# Altium PCB PCB.PcbDoc (part 3 of 5)
Units mil, origin at the board's own origin, x right, y up, seen from the top; angles counter-clockwise.
Board outline 7500 x 6500 mil, 2 copper layers (Top Layer, Bottom Layer); 229 components, 273 nets, 1476 pads, 506 vias.
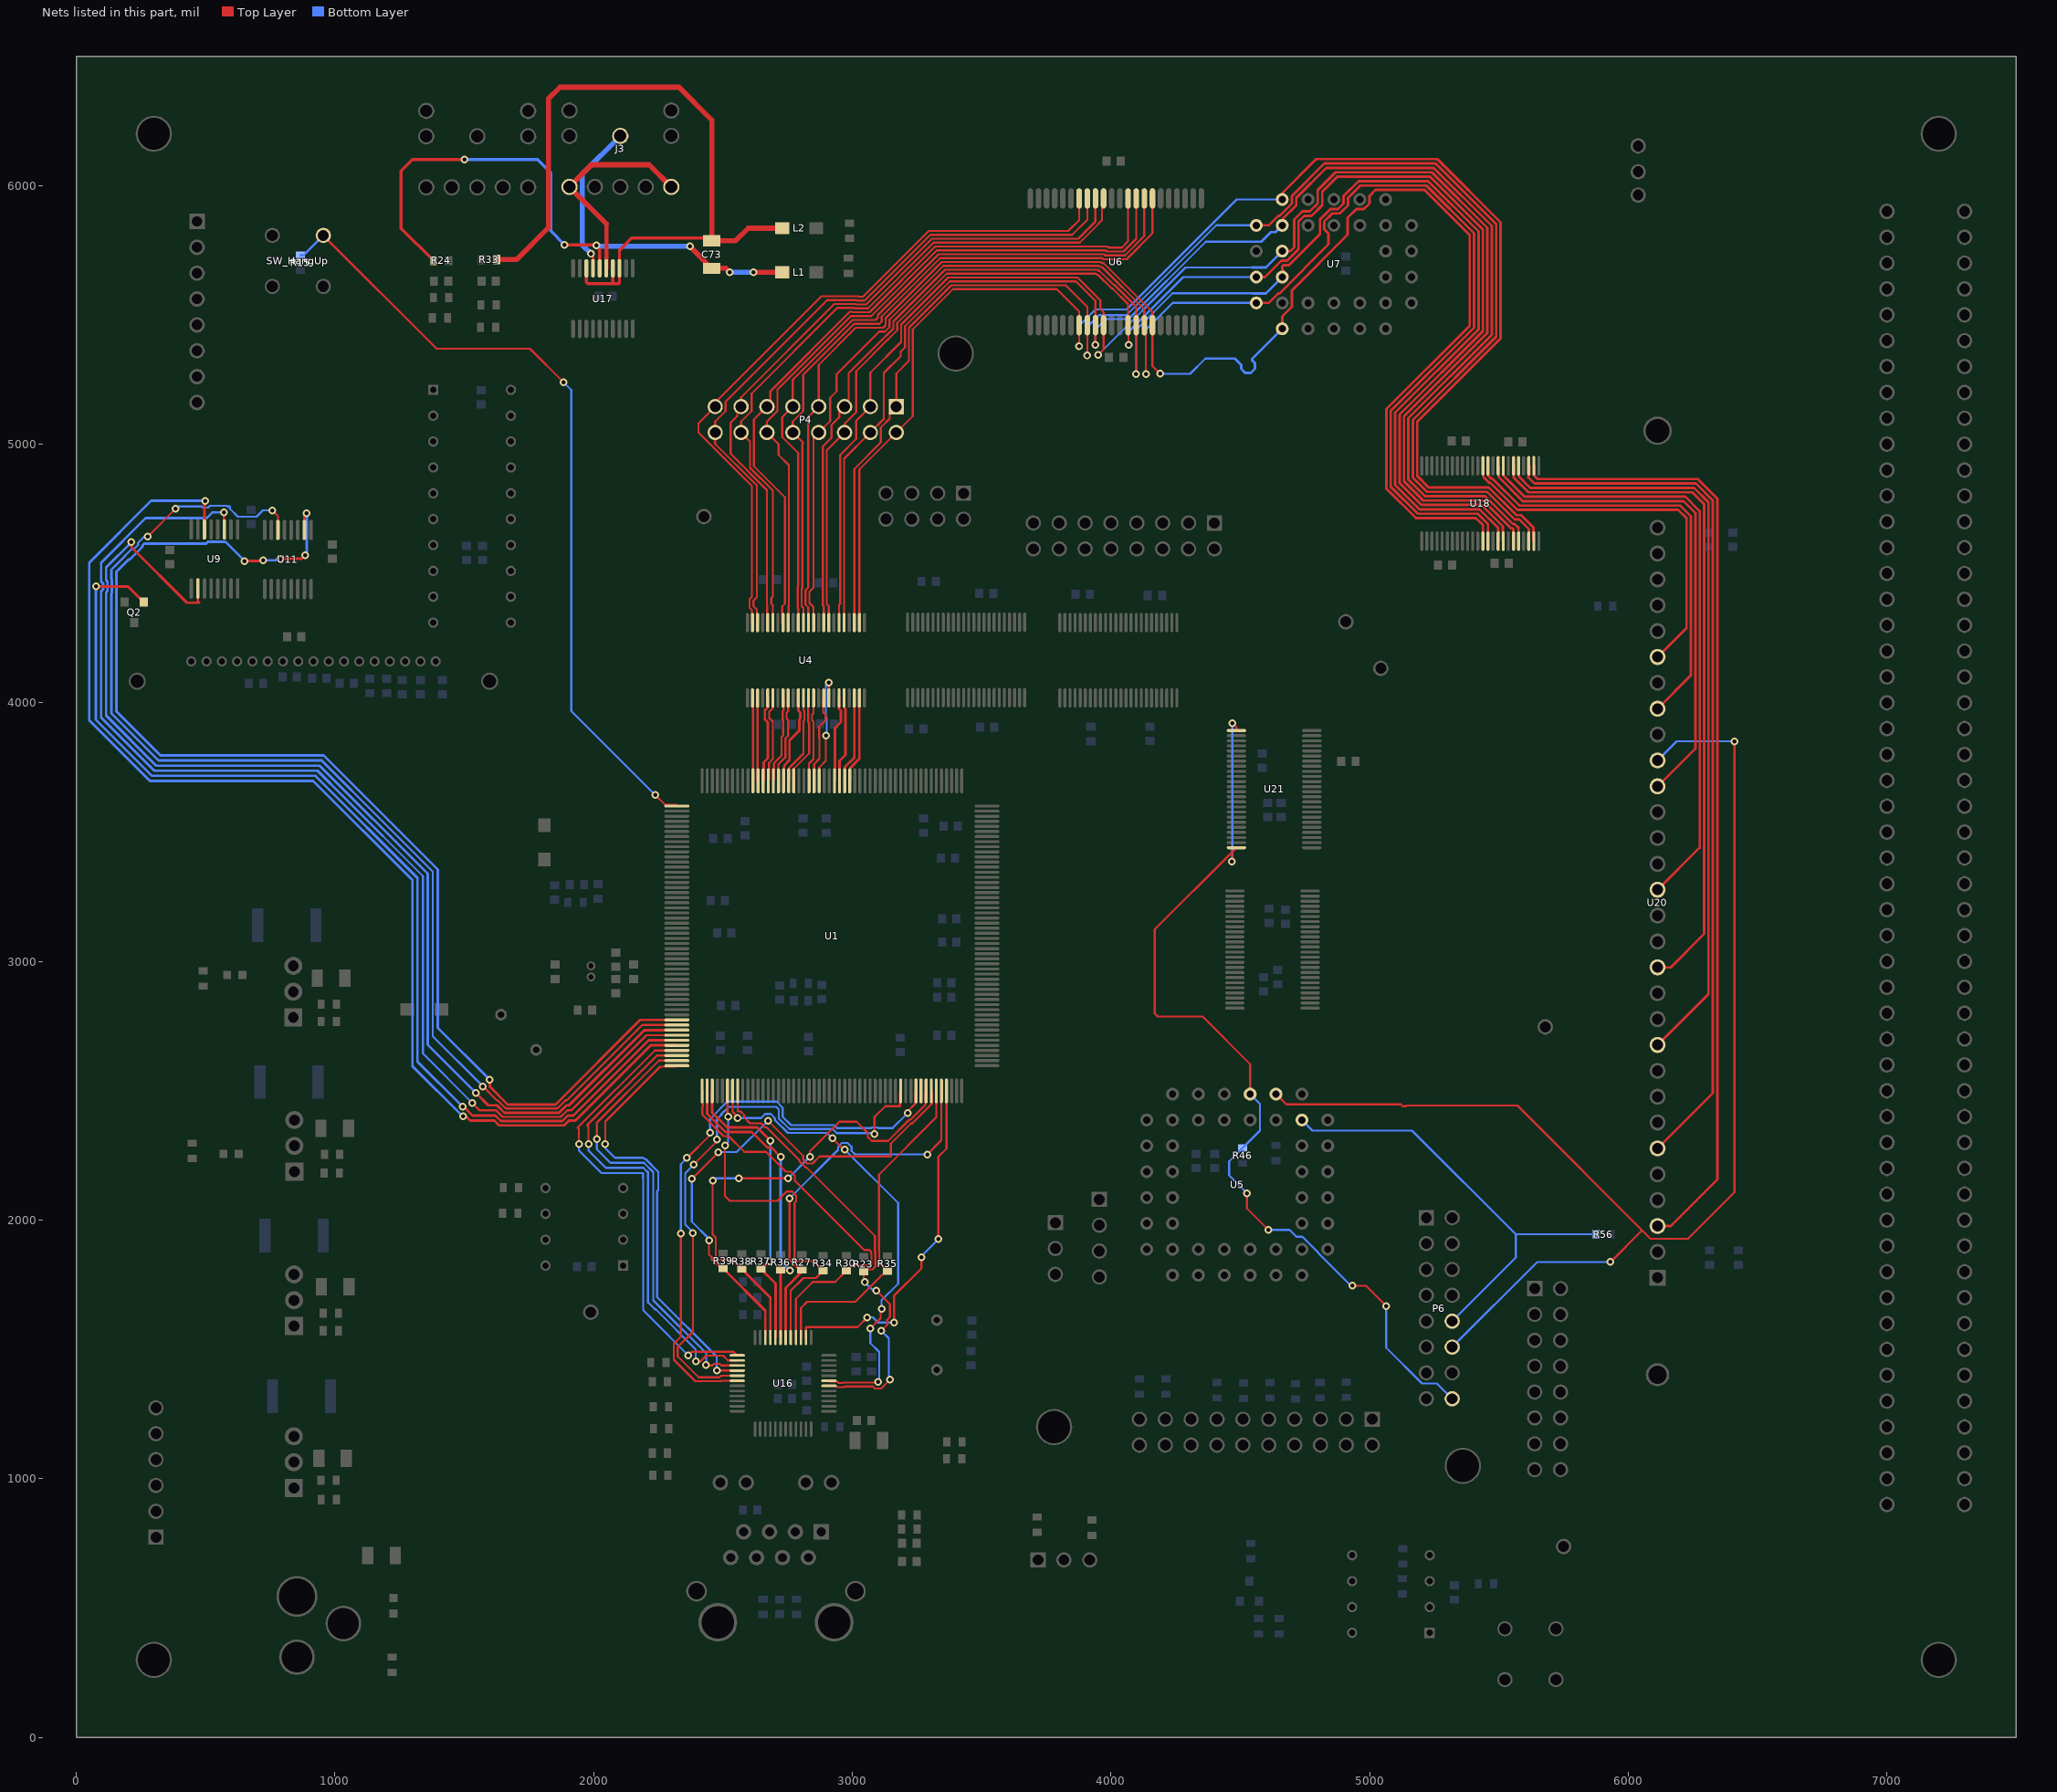
[diagram p3: the nets of this part, all layers, seen from the top]

## Via types
v1: diameter 30, hole 16, Top Layer to Bottom Layer, 500 vias
v2: diameter 30, hole 16, Top Layer to Bottom Layer, tented top, 6 vias

## Nets (pads, with @x,y where several pads share a name; then routed paths per layer and width w, separated by ;. In a path a pad name is that pad's centre, name@x,y a point inside that pad or via, vN(x,y) a via of type N, cw(c..) or ccw(c..) an arc to the next point about the centre after c; other vN are vias at no path point) (continued)
AUD_VDD: C73.2 L1.1 R24.2 U17.6 | length 2305.1
  Top Layer w8: U17.6@2023.18,5680 U17.6@2027,5683.82
  Top Layer w12: R24.2@1380.47,5710 1256,5834.47 1256,6056 1300,6100 v1(1500,6100) ; v1(1888,5771) 2004.25,5771 2009.13,5766.13 2023.18,5752.07 U17.6@2023.18,5680
  Top Layer w20: v1@2009.13,5766.13 v1(2011,5768) ; v1(2371.85,5765) C73.2@2457,5679.85 2511.15,5679.85 v1(2526,5665) ; v1(2618,5665) L1.1@2729.06,5665
  Bottom Layer w12: v1(1500,6100) 1782.93,6100 1834,6048.93 1834,5825 v1(1888,5771)
  Bottom Layer w20: v1(2011,5768) 2008,5765 v1(2371.85,5765) ; v1(2526,5665) v1(2618,5665)
AUD_VSS: C73.1 L2.1 R33.1 U17.3 U17.4 U17.8 | length 2960.2
  Top Layer w12: U17.8@1972,5680 1972,5626 1977,5621 2071,5621 ; U17.4@2074.36,5680 2074.36,5624.36 2071,5621 ; C73.1@2457,5786.15 2457,5797 2147,5797 2099.95,5749.95 U17.3@2099.95,5680 2099.95,5622.95 2098,5621 2071,5621
  Top Layer w20: R33.1@1625.53,5714 1703,5714 1825,5836 1825,6335 1870,6380 2330,6380 2457,6253 C73.1@2457,5797 ; C73.1@2457,5786.15 2548.15,5786.15 2597,5835 L2.1@2729.06,5835
BTN_HANGUP: R15.1 SW_HangUp.1 U1.1 | length 3127.1
  Top Layer w8: SW_HangUp.1@955,5806.85 1392.85,5369 1754,5369 v1(1884,5239) ; v1(2238,3644) 2277.21,3604.79 2317.77,3604.79 U1.1@2321.77,3600.79
  Bottom Layer w8: v1(1884,5239) 1914,5209 1914,3968 v1(2238,3644)
  Bottom Layer w10: R15.1@867,5730.53 878.68,5730.53 SW_HangUp.1@955,5806.85
CAS: P6.10 R56.2 U5.19 | length 1758
  Bottom Layer w8: U5.19@4738,2387 4779,2346 5164,2346 5565,1945 ; P6.10@5319,1609 5565,1855 5565,1945 ; R56.2@5875,1945 5565,1945
COL_ADDR_EN: P6.16 R46.1 U5.22 U21.25 U21.48 | length 3672.1
  Top Layer w8: v1(4468,3387) 4468,3422.73 ; v1(4469,3921) 4485,3905 U21.25@4485,3892.48 ; U21.48@4485,3439.73 4468,3422.73 ; v1(4526,2104) 4526,2045 v1(4609,1962) ; U5.22@4538,2487 4538,2603 4354,2787 4181,2787 4169,2799 4169,3123.73 4468,3422.73 ; v1(4933,1746) 4986,1746 v1(5064,1668)
  Bottom Layer w8: v1(4468,3387) 4469,3388 v1(4469,3921) ; v1(4526,2104) 4457,2173 4457,2226.53 R46.1@4509,2278.53 4576,2345.53 4576,2449 U5.22@4538,2487 ; v1(4609,1962) 4690.88,1962 4716.88,1936 4739.91,1936 4802,1873.91 4802,1872.09 4928.09,1746 v1(4933,1746) ; v1(5064,1668) 5064,1506.69 5202.21,1368.47 5259.53,1368.47 P6.16@5319,1309
D_3V3B0: P4.2 U4.2 U6.7 U7.13 U18.47 | length 5885.8
  Top Layer w8: U4.2@3027.48,4310 3027.48,4902.48 P4.2@3170,5045 3234,5109 3234,5444 3389,5599 3791,5599 3877.02,5512.98 U6.7@3877.02,5460 v1(3877.02,5378.98)
  Top Layer w10: U7.13@4662,5946 4662,5970.45 4793.55,6102 5261.29,6102 5506,5857.29 5506,5408.46 5183.67,5086.13 5183.67,4877.43 5228.16,4832.94 5460.35,4832.94 5567.89,4725.4 5585.52,4725.4 5632.87,4678.05 5632.87,4626.78 U18.47@5634.65,4625
  Bottom Layer w8: v1(3877.02,5378.98) 3877.02,5458.02 3940,5521 4060.95,5521 4485.95,5946 U7.13@4662,5946
D_3V3B1: P4.1 U4.3 U6.8 U7.14 U18.46 | length 5966
  Top Layer w8: U4.3@3007.8,4310 3007.8,4904.01 3110.53,5006.74 3110.53,5064.31 3145,5098.79 3145,5116.6 3144.47,5117.13 3144.47,5119.47 P4.1@3170,5145 3170,5273 3219,5322 3219,5450.21 3382.79,5614 3825,5614 3908.51,5530.49 U6.8@3908.51,5460 v1(3908.51,5342.49)
  Top Layer w10: U7.14@4562,5846 4609.67,5846 4646.67,5883 4651.33,5883 4699,5930.67 4699,5959.37 4824.63,6085 5254.25,6085 5489,5850.25 5489,5415.5 5166.67,5093.17 5166.67,4870.38 5221.12,4815.94 5453.31,4815.94 5560.85,4708.4 5578.48,4708.4 5614.96,4671.92 U18.46@5614.96,4625
  Bottom Layer w8: v1(3908.51,5342.49) 3908.51,5453.51 3954,5499 4060.16,5499 4407.16,5846 U7.14@4562,5846
D_3V3B2: P4.4 U4.5 U6.9 U7.15 U18.44 | length 5894.3
  Top Layer w8: U4.5@2968.43,4310 2968.43,4943.43 P4.4@3070,5045 3122,5097 3122,5275 3187,5340 3187,5357.23 3204,5374.23 3204,5456.43 3376.57,5629 3865,5629 3940.01,5553.99 U6.9@3940.01,5460 v1(3940.01,5383.99)
  Top Layer w10: U7.15@4662,5846 4662,5869.63 4716,5923.63 4716,5952.33 4831.67,6068 5247.21,6068 5472,5843.21 5472,5422.54 5149.67,5100.21 5149.67,4863.34 5214.08,4798.94 5446.27,4798.94 5553.81,4691.4 5560.46,4691.4 5575.59,4676.28 U18.44@5575.59,4625
  Bottom Layer w8: v1(3940.01,5383.99) 3940.01,5443.01 3981,5484 4067.79,5484 4366.79,5783
  Bottom Layer w10: 4366.79,5783 4581.82,5783 4618.82,5820 4636,5820 U7.15@4662,5846
D_3V3B3: P4.3 U4.6 U6.10 U7.17 U18.43 | length 5998.7
  Top Layer w8: U4.6@2948.74,4310 2948.74,4378.97 2953,4383.23 2953,4958 3015,5020 3015,5090 P4.3@3070,5145 3070,5276 3189,5395 3189,5462.64 3370.36,5644 3871.21,5644 3959,5556.21 3959,5522.23 3971.5,5509.73 U6.10@3971.5,5460 3971.5,5366.5 v1(3950,5345)
  Top Layer w10: U7.17@4662,5746 4693.63,5746 4708,5760.37 4708,5868.37 4739.63,5900 4768.33,5900 4799,5930.67 4799,5982.08 4867.92,6051 5240.17,6051 5455,5836.17 5455,5429.58 5132.67,5107.25 5132.67,4856.3 5207.03,4781.94 5439.23,4781.94 5546.76,4674.4 5553.42,4674.4 5555.91,4671.92 U18.43@5555.91,4625
  Bottom Layer w8: v1(3950,5345) 4288,5683 4546.67,5683
  Bottom Layer w10: 4546.67,5683 4599,5683 U7.17@4662,5746
D_3V3B4: P4.6 U4.8 U6.13 U7.18 U18.41 | length 5940.4
  Top Layer w8: U4.8@2909.37,4310 2909.37,4373.86 2901,4382.23 2901,4976 P4.6@2970,5045 2970,5079 3015,5124 3015,5282 3138,5405 3138.85,5405 3174,5440.15 3174,5468.85 3364.15,5659 3941.74,5659 3945.74,5655 3949.8,5655 4003.8,5601 4006.77,5601 4065.99,5541.78 U6.13@4065.99,5460 4068,5457.99 v1(4068,5384)
  Top Layer w10: U7.18@4562,5646 4595.53,5646 4658.53,5709 4680.67,5709 4725,5753.33 4725,5861.33 4746.67,5883 4775.37,5883 4816.57,5924.2 4816.57,5975.61 4874.96,6034 5233.12,6034 5438,5829.12 5438,5436.63 5115.67,5114.3 5115.67,4849.26 5199.99,4764.94 5432.19,4764.94 5514.76,4682.37 5514.76,4626.78 U18.41@5516.54,4625
  Bottom Layer w8: v1(4068,5384) 4068,5434.21 4279.79,5646 U7.18@4562,5646
D_3V3B5: P4.5 U4.9 U6.14 U7.19 U18.40 | length 6167.5
  Top Layer w8: U4.9@2889.69,4310 2889.69,4372.33 2886,4376.02 2886,4991 2920,5025 2920,5073.79 2950,5103.79 2950,5125 P4.5@2970,5145 2986,5161 2986,5274.21 3131.79,5420 3132.64,5420 3159,5446.36 3159,5475.07 3357.93,5674 3947.95,5674 3951.95,5670 3956.02,5670 4010.02,5616 4012.98,5616 4097.49,5531.49 U6.14@4097.49,5460 v1(4097.49,5271.51)
  Top Layer w10: U7.19@4662,5646 4682,5646 4682,5654.28 4662.16,5674.12 4662.16,5688.59 4665.57,5692 4687.72,5692 4808,5812.28 4808,5868.37 4848.63,5909 4877.33,5909 4899,5930.67 4899,5959.37 4956.63,6017 5226.08,6017 5421,5822.08 5421,5443.67 5098.67,5121.34 5098.67,4842.22 5192.95,4747.94 5425.15,4747.94 5496.85,4676.23 U18.40@5496.85,4625
  Bottom Layer w8: v1(4097.49,5271.51) 4097.49,5442.49 4238,5583 4546.67,5583
  Bottom Layer w10: 4546.67,5583 4599,5583 U7.19@4662,5646
D_3V3B6: P4.8 U4.11 U6.15 U7.20 U18.38 | length 6167.2
  Top Layer w8: U4.11@2850.32,4310 2850.32,4369.91 2834,4386.23 2834,4429 2850.32,4445.32 2850.32,5025.32 P4.8@2870,5045 2914,5089 2914,5179 2939,5204 2939,5270 3104,5435 3126.43,5435 3144,5452.57 3144,5481.28 3351.72,5689 3954.16,5689 3958.16,5685 3965.2,5685 4128.98,5521.21 U6.15@4128.98,5460 4135,5453.98 v1(4135,5271)
  Top Layer w10: U7.20@4562,5546 4609.67,5546 4646.67,5583 4651.33,5583 4841.02,5772.69 4841.02,5814.65 4825,5830.67 4825,5861.33 4855.67,5892 4884.37,5892 4916,5923.63 4916,5952.33 4963.67,6000 5219.04,6000 5404,5815.04 5404,5450.71 5081.67,5128.38 5081.67,4835.18 5185.91,4730.94 5418.11,4730.94 5457.48,4691.56 U18.38@5457.48,4625
  Bottom Layer w8: v1(4135,5271) 4135,5442 4239,5546 U7.20@4562,5546
D_3V3B7: P4.7 U4.12 U6.16 U7.21 U18.37 | length 6210.4
  Top Layer w8: U4.12@2830.63,4310 2829.47,4311.16 2829.47,4369.55 2819,4380.02 2819,4435.21 2829.47,4445.69 2829.47,5104.47 P4.7@2870,5145 2870,5306.64 3013.36,5450 3120.21,5450 3129,5458.79 3129,5487.49 3345.51,5704 3960.38,5704 3964.38,5700 3971.45,5700 4160.48,5510.97 U6.16@4160.48,5460 4160.48,5301.52 v1(4190,5272)
  Top Layer w10: U7.21@4662,5446 4662,5493.67 4699,5530.67 4699,5594 4915,5810 4915,5875 4949,5909 4977.33,5909 4999,5930.67 4999,5959 5023,5983 5212,5983 5387,5808 5387,5457.75 5064.67,5135.42 5064.67,4828.13 5178.87,4713.94 5411.06,4713.94 5437.8,4687.21 U18.37@5437.8,4625
  Bottom Layer w8: v1(4190,5272) 4306,5272 4365,5331 4478.37,5331
  Bottom Layer w10: 4478.37,5331 4503,5306.37 4503,5290.82 4518.82,5275 4541.18,5275 4557,5290.82 4557,5313.18 4546,5324.18 4546,5330 U7.21@4662,5446
D_3V3B8: P4.10 U4.13 U6.29 | length 2724.3
  Top Layer w8: U4.13@2810.95,4310 2810.95,4366.86 2804,4373.8 2804,4441.43 2806.26,4443.69 2806.26,4999.37 2810.95,5004.06 P4.10@2770,5045 2770,5087.69 2810.53,5128.21 2810.53,5268.38 3007.15,5465 3105.21,5465 3114,5473.79 3114,5493.71 3339.29,5719 3966.59,5719 3970.59,5715 4060.41,5715 4160.48,5815.07 U6.29@4160.48,5950.08
D_3V3B9: P4.9 U4.14 U6.30 | length 2727.6
  Top Layer w8: U4.14@2791.26,4310 2791.26,4365.33 2789,4367.59 2789,4447.64 2791.26,4449.9 2791.26,4965.9 2729.47,5027.69 2729.47,5104.47 P4.9@2770,5145 2770,5249.06 3000.94,5480 3090.21,5480 3099,5488.79 3099,5499.92 3333.08,5734 3972.8,5734 3976.8,5730 4054.2,5730 4128.98,5804.79 U6.30@4128.98,5950.08
D_3V3B10: P4.12 U4.16 U6.31 | length 2741.7
  Top Layer w8: U4.16@2751.89,4310 2754,4312.11 2754,4376.02 2755,4377.02 2755,4918.79 2715,4958.79 2715,5000 P4.12@2670,5045 2670,5087.69 2710.53,5128.21 2710.53,5210.81 2994.72,5495 3072.87,5495 3326.87,5749 3979.02,5749 3983.02,5745 4047.98,5745 4097.49,5794.51 U6.31@4097.49,5950.08
D_3V3B11: P4.11 U4.17 U6.32 | length 2778.7
  Top Layer w8: U4.17@2732.21,4310 2729.43,4307.22 2729.43,4372.66 2740,4383.23 2740,4794.85 2620,4914.85 2620,5095 P4.11@2670,5145 2688.05,5163.05 2683.66,5167.44 2683.66,5205.15 2990.16,5511.66 2999.28,5511.66 3000.93,5510 3066.65,5510 3320.65,5764 3985.23,5764 3989.23,5760 4041.77,5760 4065.99,5784.22 U6.32@4065.99,5950.08
D_3V3B12: P4.14 U4.19 U6.35 | length 2679.5
  Top Layer w8: U4.19@2692.84,4310 2692.84,4377.4 2687,4383.23 2687,4404.77 2692.84,4410.6 2692.84,4820.8 2605,4908.64 2605,5010 P4.14@2570,5045 2570,5087.69 2610.53,5128.21 2610.53,5195.53 2941.66,5526.66 3005.49,5526.66 3007.15,5525 3060.44,5525 3314.44,5779 3879.9,5779 3954,5853.1 3954,5854.77 3965,5865.77 3965,5943.57 U6.35@3971.5,5950.08
D_3V3B13: P4.13 U4.20 U6.36 | length 2695
  Top Layer w8: P4.13@2586.16,5164.94 P4.13@2588.05,5163.05 ; U4.20@2673.15,4310 2670.37,4312.78 2670.37,4378.64 2670.34,4409.33 2670.37,4822.06 2529.47,4962.95 2529.47,5083.26 2555,5108.79 2555,5123.9 2551.95,5126.95 P4.13@2570,5145 2570,5181 2930.66,5541.66 3011.7,5541.66 3013.36,5540 3054.23,5540 3308.23,5794 3873.69,5794 3939,5859.31 3939,5860.98 3940.01,5861.99 U6.36@3940.01,5950.08
D_3V3B14: P4.16 U4.22 U6.37 | length 2729.9
  Top Layer w8: U4.22@2633.78,4310 2636.56,4312.78 2636.56,4343.4 2632.99,4343.4 2631.98,4342.39 2631,4342.39 2631,4360.23 2618,4373.23 2618,4394.77 2631,4407.77 2631,4840.21 2470,5001.21 P4.16@2470,5045 2470,5087.69 2510.53,5128.21 2510.53,5164.31 2902.87,5556.66 3017.92,5556.66 3019.57,5555 3048.02,5555 3302.02,5809 3850,5809 3908.51,5867.51 U6.37@3908.51,5950.08
D_3V3B15: P4.15 U4.23 U6.38 | length 2755.9
  Top Layer w8: U4.23@2614.1,4310 2611.32,4312.78 2611.32,4358.7 2603,4367.02 2603,4400.98 2611.32,4409.3 2611.32,4838.68 2405,5045 2405,5080 P4.15@2470,5145 2470,5161 2880.66,5571.66 3024.13,5571.66 3025.79,5570 3041.8,5570 3295.8,5824 3835,5824 3877.02,5866.02 U6.38@3877.02,5950.08
D_5V0: U18.2 U20.3 | length 3723.3
  Top Layer w10: U18.2@5636.42,4916.34 U18.2@5634.65,4916.34 5636.42,4914.56 5636.42,4877.43 5648.85,4865 6268.29,4865 6344,4789.29 6344,2157.09 6163.91,1977 U20.3@6113,1977
D_5V1: U18.3 U20.6 | length 3392.1
  Top Layer w10: U18.3@5614.96,4916.34 5616.74,4914.56 5616.74,4880.78 5613,4877.04 5613,4871.38 5636.38,4848 6261.25,4848 6327,4782.25 6327,2491 U20.6@6113,2277
D_5V2: U18.5 U20.10 | length 2996.1
  Top Layer w10: U18.5@5575.59,4916.34 5575.59,4876.33 5620.92,4831 6254.21,4831 6310,4775.21 6310,2874 U20.10@6113,2677
D_5V3: U18.6 U20.13 | length 2720
  Top Layer w10: U18.6@5555.91,4916.34 5557.68,4914.56 5557.68,4870.19 5613.88,4814 6247.17,4814 6293,4768.17 6293,3106.09 6163.91,2977 U20.13@6113,2977
D_5V4: U18.8 U20.16 | length 2385.4
  Top Layer w10: U18.8@5516.54,4916.34 5516.54,4879.2 5598.74,4797 6220.12,4797 6276,4741.12 6276,3440 U20.16@6113,3277
D_5V5: U18.9 U20.20 | length 1979.5
  Top Layer w10: U18.9@5496.85,4916.34 5498.63,4914.56 5498.63,4873.07 5591.7,4780 6213.08,4780 6259,4734.08 6259,3823 U20.20@6113,3677
D_5V6: U18.11 U20.23 | length 1684.6
  Top Layer w10: U18.11@5457.48,4916.34 5457.48,4879.2 5469.75,4866.94 5474.44,4866.94 5578.37,4763 6200.04,4763 6242,4721.04 6242,4106 U20.23@6113,3977
D_5V7: U18.12 U20.25 | length 1478.7
  Top Layer w10: U18.12@5437.8,4916.34 5439.57,4914.56 5439.57,4873.07 5462.71,4849.94 5467.4,4849.94 5571.33,4746 6193,4746 6225,4714 6225,4289 U20.25@6113,4177
DATA0: U1.179 U4.47 | length 335.9
  Top Layer w10: U1.179@2990.08,3698.23 2991.86,3700.01 2991.86,3747.97 3027.48,3783.59 U4.47@3027.48,4018.66
DATA1: U1.180 U4.46 | length 337.7
  Top Layer w10: U1.180@2970.39,3698.23 2972.17,3700.01 2972.17,3752.32 3007.8,3787.95 U4.46@3007.8,4018.66 U4.46@3009.57,4018.66
DATA2: U1.181 U4.44 | length 331.6
  Top Layer w10: U1.181@2950.71,3698.23 2950.71,3775.71 2973.06,3798.06 2973.06,3976.17 2968.43,3980.8 U4.44@2968.43,4018.66
DATA3: U1.182 U4.43 | length 333.8
  Top Layer w10: U1.182@2931.02,3698.23 2932.8,3700.01 2932.8,3901.8 2956.06,3925.06 2956.06,3969.13 2948.74,3976.44 U4.43@2948.74,4018.66
DATA4: U1.185 U4.41 | length 458
  Top Layer w8: U1.185@2871.97,3698.23 2871.97,3749.97 2898,3776 v1(2898,3874) ; U4.41@2909.37,4018.66 v1(2909.37,4078.37)
  Bottom Layer w8: v1(2898,3874) 2901.19,3877.19 2901.19,3941.27 2898,3944.46 2898,4067 v1(2909.37,4078.37)
DATA5: U1.186 U4.40 | length 345.7
  Top Layer w8: U1.186@2852.28,3698.23 2852.28,3763.07 2873,3783.79 2873,3862.23 2872,3863.23 2872,3908.23 2880.77,3917 2881.77,3917 2897,3932.23 2897,3953.77 2886.91,3963.86 2886.91,4015.88 U4.40@2889.69,4018.66
DATA6: U1.187 U4.38 | length 332.2
  Top Layer w8: U1.187@2832.6,3698.23 2832.6,3764.6 2850.32,3782.32 2850.32,3925.91 2845,3931.23 2845,3954.77 2850.32,3960.09 U4.38@2850.32,4018.66
DATA7: U1.190 U4.37 | length 347.4
  Top Layer w8: U1.190@2773.54,3698.23 2773.54,3744.77 2833,3804.23 2833,3922.02 2830,3925.02 2830,3975.02 2829,3976.02 2829,4017.03 U4.37@2830.63,4018.66
DATA8: U1.191 U4.36 | length 347.4
  Top Layer w8: U1.191@2753.86,3698.23 2756.64,3701.01 2756.64,3749.08 2810.95,3803.39 2810.95,3929.13 2815,3933.19 2815,3968.81 2810.95,3972.87 U4.36@2810.95,4018.66
DATA9: U1.192 U4.35 | length 350.5
  Top Layer w10: U1.192@2734.17,3698.23 2735.95,3700.01 2735.95,3752.32 2739.25,3755.62 2739.25,3759.98 2757.54,3778.27 2757.54,3855.17 2794.95,3892.57 2794.95,3935.76 2799,3939.82 2799,3962.18 2791.26,3969.92 U4.35@2791.26,4018.66
DATA10: U1.193 U4.33 | length 340.8
  Top Layer w8: U1.193@2714.49,3698.23 2714.49,3761.97 2741.54,3789.03 2741.54,3861.8 2751.89,3872.14 2751.89,3933.49 2746,3939.38 2746,3961.77 2751.89,3967.66 U4.33@2751.89,4018.66
DATA11: U1.194 U4.32 | length 338.4
  Top Layer w8: U1.194@2694.8,3698.23 2697.58,3701.01 2697.58,3766.28 2726.54,3795.24 2726.54,3868.01 2732.21,3873.67 2732.21,3931.96 2731,3933.17 2731,3967.98 2734,3970.98 2734,4016.87 U4.32@2732.21,4018.66
DATA12: U1.195 U4.30 | length 339.5
  Top Layer w8: U1.195@2675.12,3698.23 2677.9,3701.01 2677.9,3767.81 2693,3782.91 2693,3927.23 2679,3941.23 2679,3964.75 2693,3978.75 2693,4018.5 U4.30@2692.84,4018.66
DATA13: U1.196 U4.29 | length 336.8
  Top Layer w10: U1.196@2655.43,3698.23 2657.21,3700.01 2657.21,3769.75 2673.15,3785.69 2673.15,3924.45 2662.24,3935.36 2662.24,3970.62 2673.15,3981.53 U4.29@2673.15,4018.66
DATA14: U1.197 U4.27 | length 321.2
  Top Layer w10: U4.27@2633.78,4018.66 2633.97,4018.47 2633.97,3700.01 U1.197@2635.75,3698.23
DATA15: U1.198 U4.26 | length 321.2
  Top Layer w10: U4.26@2614.1,4018.66 2615.87,4016.88 2615.87,3979.75 2616.06,3979.56 U1.198@2616.06,3698.23
DISP_A0: U1.46 U9.3 | length 4626.9
  Top Layer w8: v1(1531,2453) 1560.08,2423.94 1623.17,2423.94 1648.12,2399 1872.69,2399 1897.63,2423.94 1913.27,2423.94 2204.28,2714.96 U1.46@2321.77,2714.96
  Top Layer w10: v1(571,4736) 571,4671.56 U9.3@572.39,4670.17
  Bottom Layer w8: 1035.84,3633.84 1340,3329.68 1340,2644.02 v1(1531,2453)
  Bottom Layer w10: v1(571,4736) 529.41,4736 527.8,4737.61 504.18,4714 268.14,4714 95.94,4541.81 95.94,4469.24 104,4461.18 104,4438.82 95.94,4430.76 95.94,3942.54 301.11,3737.37 932.31,3737.37 1035.84,3633.84
DISP_BCKLIGHT: Q2.G U1.47 | length 4159.2
  Top Layer w10: v1(77,4450) 200.14,4450 Q2.G@261.4,4388.74 ; v1(1494,2439) 1497.18,2439 1531.92,2404.26 1620.23,2404.26 1641.49,2383 1879.31,2383 1900.57,2404.26 1921.42,2404.26 2212.44,2695.28 U1.47@2321.77,2695.28
  Bottom Layer w10: v1(77,4450) 76.26,4449.26 76.26,3934.38 292.96,3717.69 924.15,3717.69 1319.26,3322.58 1319.26,2612.44 1492.7,2439 v1(1494,2439)
DISP_CS: U1.45 U9.10 | length 4502.6
  Top Layer w10: v1(213.32,4621) 213.32,4601.68 428,4387 474,4387 470.02,4390.98 U9.10@470.02,4441.83 ; v1(1545.67,2490.67) 1592.72,2443.63 1626.12,2443.63 1654.75,2415 1866.06,2415 1894.69,2443.63 1905.11,2443.63 2196.13,2734.65 U1.45@2321.77,2734.65
  Bottom Layer w10: v1(213.32,4621) 115.63,4523.31 115.63,4473.6 121,4468.23 121,4431.77 115.63,4426.4 115.63,3950.69 309.27,3757.06 940.46,3757.06 1358.63,3338.89 1358.63,2677.72 v1(1545.67,2490.67)
DISP_MOSI: U1.43 U11.10 | length 4910.7
  Top Layer w10: v1(651,4548) 719,4548 v1(722,4551) ; v1(787,4557) 871,4557 v1(885,4571) ; U11.10@881.98,4668.17 881.98,4729.98 891,4739 v1(891,4733) ; v1(1598,2543) 1598.84,2542.16 1598.84,2516.16 1668,2447 1852.8,2447 2179.82,2774.02 U1.43@2321.77,2774.02
  Bottom Layer w10: v1(651,4548) 577,4622 508.82,4622 501.82,4615 263,4615 255.32,4607.32 255.32,4603.6 205.72,4554 202,4554 155,4507 155,3967 325.57,3796.43 956.77,3796.43 1398,3355.2 1398,2743 v1(1598,2543) ; v1(722,4551) 781,4551 v1(787,4557) ; v1(885,4571) 891,4577 v1(891,4733)
DISP_RST: U1.48 U9.6 | length 4739.2
  Top Layer w10: U9.6@495.61,4670.17 495.61,4777.61 v1(499,4781) ; v1(1496,2402) 1505.65,2402 1523.08,2384.57 1615.87,2384.57 1634.45,2366 1886.36,2366 1904.93,2384.57 1929.57,2384.57 2220.59,2675.59 U1.48@2321.77,2675.59
  Bottom Layer w10: v1(499,4781) 289.8,4781 50,4541.2 50,3932.8 284.8,3698 916,3698 1299.57,3314.43 1299.57,2595.24 1492.82,2402 v1(1496,2402)
DISP_SCK: U1.44 U11.14 | length 4735.6
  Top Layer w8: v1(276,4642) v1(384,4750) ; v1(758,4744) 779.61,4722.39 U11.14@779.61,4668.17 ; v1(1571.84,2516.84) 1625.36,2463.31 1629.06,2463.31 1661.37,2431 1859.43,2431 1891.75,2463.31 1896.96,2463.31 2187.97,2754.33 U1.44@2321.77,2754.33
  Bottom Layer w8: 188.08,4567.92 215.16,4595 224.09,4595 239.32,4610.23 239.32,4619.16 262.16,4642 v1(276,4642) ; v1(384,4750) 393,4759 484.23,4759 488.23,4755 509.77,4755 516.77,4762 581.77,4762 584.77,4759 594,4759 594,4750.23 624.42,4719.81 697.27,4719.81 721.46,4744 v1(758,4744) ; 1063.68,3661.68 1378.31,3347.04 1378.31,2710.36 v1(1571.84,2516.84)
  Bottom Layer w10: 188.08,4567.92 135.31,4515.15 135.31,4477.95 138,4475.27 138,4424.73 135.31,4422.05 135.31,3958.85 317.42,3776.74 948.62,3776.74 1063.68,3661.68
DRAM_WE: P6.12 U5.20 U20.21 | length 5072.1
  Top Layer w8: U5.20@4638,2487 4678,2447 5120.21,2447 5127.21,2440 5140.23,2440 5143.23,2443 5571,2443 6086,1928 6230,1928 6410,2108 v1(6410,3851) ; v1(5931,1838) 6053,1960
  Bottom Layer w8: P6.12@5319,1509 5648,1838 v1(5931,1838) ; U20.21@6113,3777 6187,3851 v1(6410,3851)
EAROUT+: J3.A J3.D U17.5 | length 839.8
  Top Layer w15: U17.5@2050,5678.77 2050,5851.03
  Top Layer w20: 2050,5851.03 J3.D@1906.3,5994.73 1991.57,6080 2214.73,6080 J3.A@2300,5994.73
EAROUT-: J3.E U17.7 | length 591.6
  Top Layer w12: v1(1990,5736) 1997.59,5728.41 U17.7@1997.59,5680
  Bottom Layer w12: v1(1990,5736) v1@1990,5738
  Bottom Layer w20: v1(1990,5736) 1956.23,5769.77 1956.23,6044.66 J3.E@2103.15,6191.58
ECOL: R27.1 U1.100 U16.42 | length 1512.8
  Top Layer w8: v1(2757,2084) 2757,1845.26 2776.51,1825.75 2777.02,1825.75 2786,1816.77 2786,1816.26 2795.79,1806.47 R27.1@2805,1806.47 ; v1(3290,2254) 3344.41,2308.41 U1.100@3344.41,2499.41
  Top Layer w10: U16.42@2742.31,1546 2742.31,1737.31 2805,1800 R27.1@2805,1806.47
  Bottom Layer w8: v1(2757,2084) 2945,2272 2945,2282.77 2960.23,2298 2981.77,2298 2997,2282.77 2997,2267.21 3010.21,2254 v1(3290,2254)
ECRS: R30.1 U1.53 U16.40 | length 1529.9
  Top Layer w8: U1.53@2419.21,2499.41 2421.99,2502.19 2421.99,2441.62 2420,2439.63 2420,2407.33 2502.33,2325 2521.37,2325 2582.37,2264 2666.23,2264 2743.23,2187 2762.77,2187 2778,2171.77 2778,2152.23 3045.92,1884.31 3066.27,1884.31 3072.72,1877.86 3072.72,1873.28 3074,1872 3074,1830.48 3067.52,1824 3066.27,1825.25 2997.78,1825.25 R30.1@2977,1804.47 2933.53,1761 2847,1761 2781.68,1695.68 U16.40@2781.68,1546
EMDC: U1.59 U16.31 | length 1833
  Top Layer w8: U1.59@2537.32,2499.41 2537.32,2418.45 2557,2398.77 v1(2557,2394) ; U16.31@2909.64,1378.68 2913.4,1374.91 2942.36,1374.91 2947.28,1370 2963.8,1370 2965.8,1372 3096,1372 v1(3099,1375) ; v1(2923,2316) 2967,2272 v1(2971,2272) ; v1(3070,1581) 3109.38,1620.38 3109.38,1653.38 v1(3113,1657)
  Bottom Layer w8: v1(2557,2394) 2647.23,2394 2663.23,2410 2684.77,2410 2701,2393.77 2701,2386.8 2750.8,2337 2902,2337 v1(2923,2316) ; v1(2971,2272) 3177,2066 3177,1754 3113,1690 v1(3113,1657) ; v1(3070,1581) 3070,1524.02 3103.72,1490.3 3103.72,1379.72 v1(3099,1375)
EMDIO: R23.2 U1.60 U16.30 | length 1741.7
  Top Layer w8: U1.60@2557.01,2499.41 2557.01,2421.99 2559,2420 2567.77,2420 2583,2404.77 2583,2396 2605,2374 2647.23,2374 2663.23,2358 2668.77,2358 2795,2231.77 2795,2228.02 2819.02,2204 2822.77,2204 3087.72,1939.05 3087.72,1879.5 3089,1878.21 3089,1819.79 3078.21,1809 3061.31,1809 3060.06,1810.25 3053.78,1810.25 R23.2@3044,1800.47 3044,1764 v1(3048,1760) ; U16.30@2909.64,1358.99 2937.07,1358.99 2941.76,1354.31 2969.32,1354.31 2972.02,1357 3078.98,1357 3086.98,1349 3112,1349 v1(3146,1383) ; v1(3093,1728) 3146,1675 3146,1625.77 3135,1614.77 3135,1595 v1(3112,1572)
  Bottom Layer w8: v1(3048,1760) 3080,1728 v1(3093,1728) ; v1(3112,1572) 3141,1543 3141,1388 v1(3146,1383)
ERX0: R36.2 U1.54 U16.43 | length 1194.4
  Top Layer w10: U1.54@2438.9,2499.41 2438.9,2411.06 2508.96,2341 2528,2341 2529,2340 2611.82,2340 2671.82,2280 2687,2280 v1(2723,2244) ; U16.43@2722.63,1546 2722.63,1806.1 R36.2@2723,1806.47 2759.53,1806.47 2759,1805.94 v1(2759,1805)
  Bottom Layer w10: v1(2723,2244) 2723,1841 v1(2759,1805)
ERX1: R37.2 U1.55 U16.44 | length 1155
  Top Layer w10: U1.55@2458.58,2499.41 2458.58,2415.42 2516,2358 2632,2358 v1(2683,2307) ; v1(2681,1840) 2676.53,1840 R37.2@2647,1810.47 2702.94,1754.53 U16.44@2702.94,1546
  Bottom Layer w10: v1(2681,1840) 2683,1842 v1(2683,2307)
ERX2: R38.2 U1.97 U16.45 | length 1815.1
  Top Layer w8: v1(2461,2152) 2460,2151 2460,1944.77 2472.28,1932.49 2472.28,1853.19 2478.73,1846.75 2536.72,1846.75 R38.2@2573,1810.47 ; v1(2562,2161) v1(2752,2161) ; v1(2836,2245) 2836,2265.77 2950.23,2380 3016.79,2380 3060,2336.79 3060,2321.23 3075.23,2306 3138.49,2306 3220.49,2388 3224.77,2388 3282.58,2445.81 3282.58,2499.41 U1.97@3285.35,2499.41
  Top Layer w10: R38.2@2573,1810.47 2683.26,1700.21 U16.45@2683.26,1546
  Bottom Layer w8: v1(2461,2152) 2470,2161 v1(2562,2161) ; v1(2752,2161) v1(2836,2245)
ERX3: R39.1 U1.98 U16.46 | length 2014.6
  Top Layer w8: v1(2380,2159) 2482,2261 v1(2482,2262.67) ; v1(2446,1922) 2446,1867.05 2457.28,1855.77 2457.28,1846.98 2472.51,1831.75 2482.78,1831.75 2482.78,1822.96 2493.27,1812.47 R39.1@2501,1812.47 ; v1(2674,2384) 2810,2248 2810,2234.23 2825.23,2219 2846.77,2219 2873.77,2246 3149,2246 3149,2295.3 3226.7,2373 3230.98,2373 3307.82,2449.84 3307.82,2496.63 U1.98@3305.04,2499.41
  Top Layer w10: R39.1@2501,1812.47 2663.57,1649.9 U16.46@2663.57,1546
  Bottom Layer w8: v1(2380,2159) 2380,1993.97 2446,1927.97 v1(2446,1922) ; v1(2482,2262.67) 2482.33,2263 2553,2263 v1(2674,2384)
ERXCK: U1.101 U16.38 | length 1384.6
  Top Layer w8: U16.38@2821.05,1546 2821.05,1585.05 2822.53,1586.53 3020.53,1586.53 v1(3058,1624) ; v1(3161,1604) 3161,1707 3267,1813 v1(3267,1856) ; v1(3333,1926) 3333,2245 3364.1,2276.1 U1.101@3364.1,2499.41
  Bottom Layer w8: v1(3058,1624) 3079,1624 3099,1604 v1(3161,1604) ; v1(3267,1856) 3265,1858 v1(3333,1926)
ERXDV: R35.1 U1.99 U16.39 | length 1310.3
  Top Layer w8: U16.39@2801.37,1546 2801.37,1660.37 2825,1684 3011,1684 3129.47,1802.47 R35.1@3136,1802.47 3104,1834.47 3104,1884.43 3103,1885.43 3103,2176 3324.73,2397.73 U1.99@3324.73,2499.41
ERXER: R34.1 U1.58 U16.41 | length 1433.3
  Top Layer w8: v1(2508,2289) 2508,2093 2527,2074 2710.23,2074 2746.23,2110 2767.77,2110 2783,2094.77 2783,2073.23 2776.28,2066.51 2776.28,1847.19 2782.73,1840.75 2850.72,1840.75 R34.1@2887,1804.47 2858.53,1776 2811,1776 2762,1727 U16.41@2762,1546 ; U1.58@2517.64,2499.41 2517.64,2401.36 v1(2520,2399)
  Bottom Layer w8: v1(2508,2289) 2520,2301 v1(2520,2399)
ETX0: U1.51 U16.3 | length 1723.4
  Top Layer w8: v1(2012.66,2313.99) 2012.66,2375.18 2012,2375.84 2252.7,2616.54 U1.51@2321.77,2616.54 ; v1(2435,1439) 2436.27,1437.73 2458.96,1437.73 2465.28,1444.05 2486.82,1444.05 2493.13,1437.73 U16.3@2555.31,1437.73
  Bottom Layer w8: v1(2012.66,2313.99) 2012.66,2273.34 2064.69,2221.31 2194.06,2221.31 2230.37,2185 2230.37,1689.79 2435,1485.16 v1(2435,1439)
ETX1: U1.52 U16.4 | length 1656.9
  Top Layer w8: v1(2045,2294) 2045,2381 2256.85,2592.85 2317.77,2592.85 U1.52@2321.77,2596.85 ; v1(2476.05,1418.05) U16.4@2555.31,1418.05
  Bottom Layer w8: v1(2045,2294) 2045,2278 2082,2241 2191,2241 2195.69,2236.31 2200.27,2236.31 2250.06,2186.53 2250.06,2116.01 2245.91,2111.87 2245.91,1702.09 2476.05,1471.95 v1(2476.05,1418.05)
ETX2: U1.92 U16.5 | length 2208.4
  Top Layer w8: v1(2384,1950) 2384,1568 2325,1509 2325,1473 2405.95,1392.05 2486.82,1392.05 2493.13,1398.36 U16.5@2555.31,1398.36 ; v1(2387,2214) 2477,2304 v1(2477,2311) ; v1(3086,2332) 3086,2398.48 3127.7,2440.18 3184.03,2440.18 3184.15,2440.3 3184.15,2496.63 U1.92@3186.93,2499.41
  Bottom Layer w8: v1(2384,1950) 2384,1953.2 2354,1983.2 2354,2181 v1(2387,2214) ; v1(2477,2311) 2477,2390.16 2493.92,2407.08 2493.92,2409.69 2522.23,2438 2706,2438 2716,2428 2716,2393.02 2757.02,2352 2923.77,2352 2939.77,2336 3082,2336 v1(3086,2332)
ETX3: U1.95 U16.6 | length 2248.3
  Top Layer w8: v1(2337,1948) 2337,1548.84 2310,1521.84 2310,1460.16 2393.11,1377.05 2493.03,1377.05 2494.66,1378.68 U16.6@2555.31,1378.68 ; v1(2360.84,2240.16) 2450,2329.33 v1(2450,2338) ; v1(3214,2414) 3214,2420.88 3243.21,2450.09 3243.21,2496.63 U1.95@3245.98,2499.41
  Bottom Layer w8: v1(2337,1948) 2337,2216.33 v1(2360.84,2240.16) ; v1(2450,2338) 2450,2391 2516.69,2457.69 2707.53,2457.69 2731,2434.21 2731,2399.23 2763.23,2367 2929.98,2367 2941.3,2355.69 3072.92,2355.69 3075.23,2358 3096.77,2358 3099.08,2355.69 3155.69,2355.69 v1(3214,2414)
ETXCK: U1.49 U16.1 | length 1860.2
  Top Layer w8: v1(1943,2294.33) 1943,2352.52 1938,2357.52 2236.39,2655.91 U1.49@2321.77,2655.91 ; v1(2365.9,1477.1) 2379.8,1491 2541.41,1491 U16.1@2555.31,1477.1
  Bottom Layer w8: v1(1943,2294.33) 1943,2269 2030.06,2181.94 2191,2181.94 2191,2160.77 2192,2159.77 2192,1651 2223.24,1619.76 v1(2365.9,1477.1)
ETXEN: U1.50 U16.2 | length 1810.2
  Top Layer w8: v1(1980,2294.33) 1980,2361.68 1975,2366.68 2244.54,2636.22 U1.50@2321.77,2636.22 ; v1(2395,1453) 2412.23,1453 2435.23,1476 2500.77,1476 2519.35,1457.42 U16.2@2555.31,1457.42
  Bottom Layer w8: v1(1980,2294.33) 1980,2269 2047.37,2201.63 2192.53,2201.63 2210.69,2183.47 2210.69,1681.64 2237.16,1655.16 2239.84,1655.16 2395,1500 v1(2395,1453)
ETXER: U1.96